# Altium PCB WINGS_SIGNAL_PCB.PcbDoc
Units mm, origin at the board's own origin, x right, y up, seen from the top; angles counter-clockwise.
Board outline 152.4 x 101.6 mm, 2 copper layers (Top Layer, Bottom Layer); 38 components, 33 nets, 145 pads, 26 vias.
Unrouted connection lines stored in the file: 13.
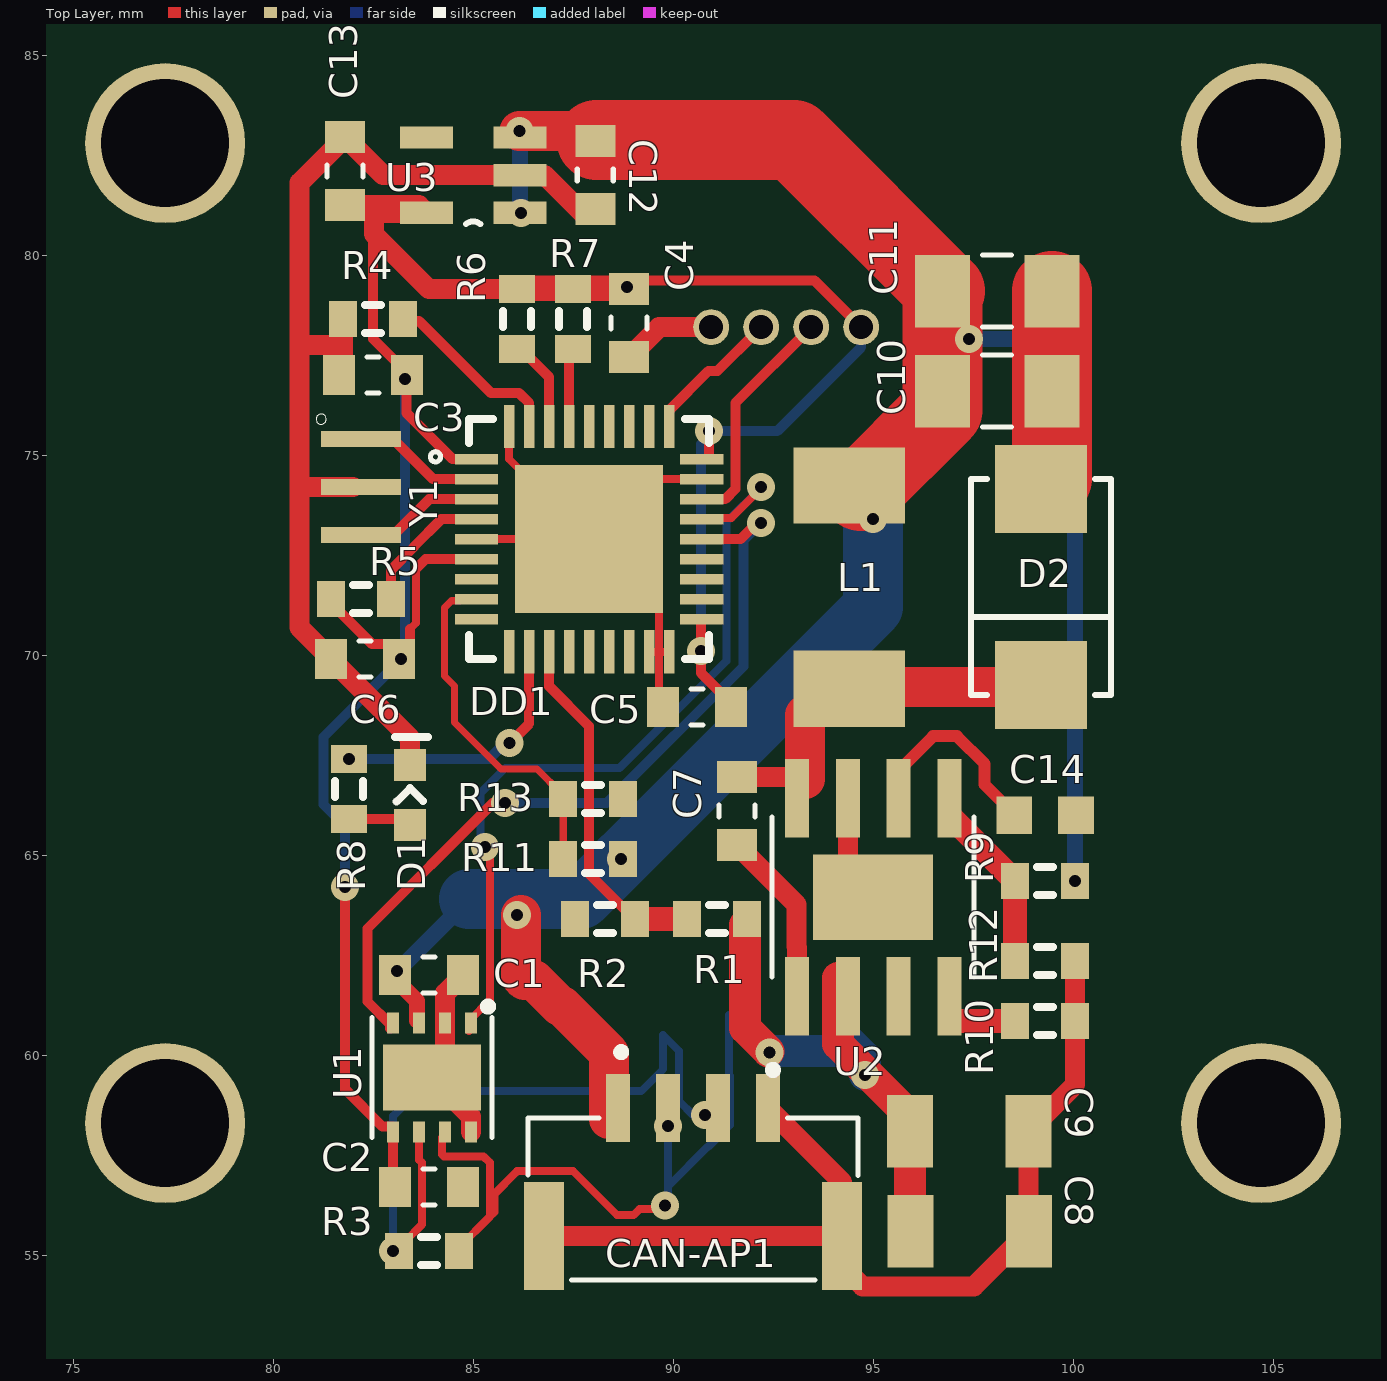
[diagram p0: Top Layer view]
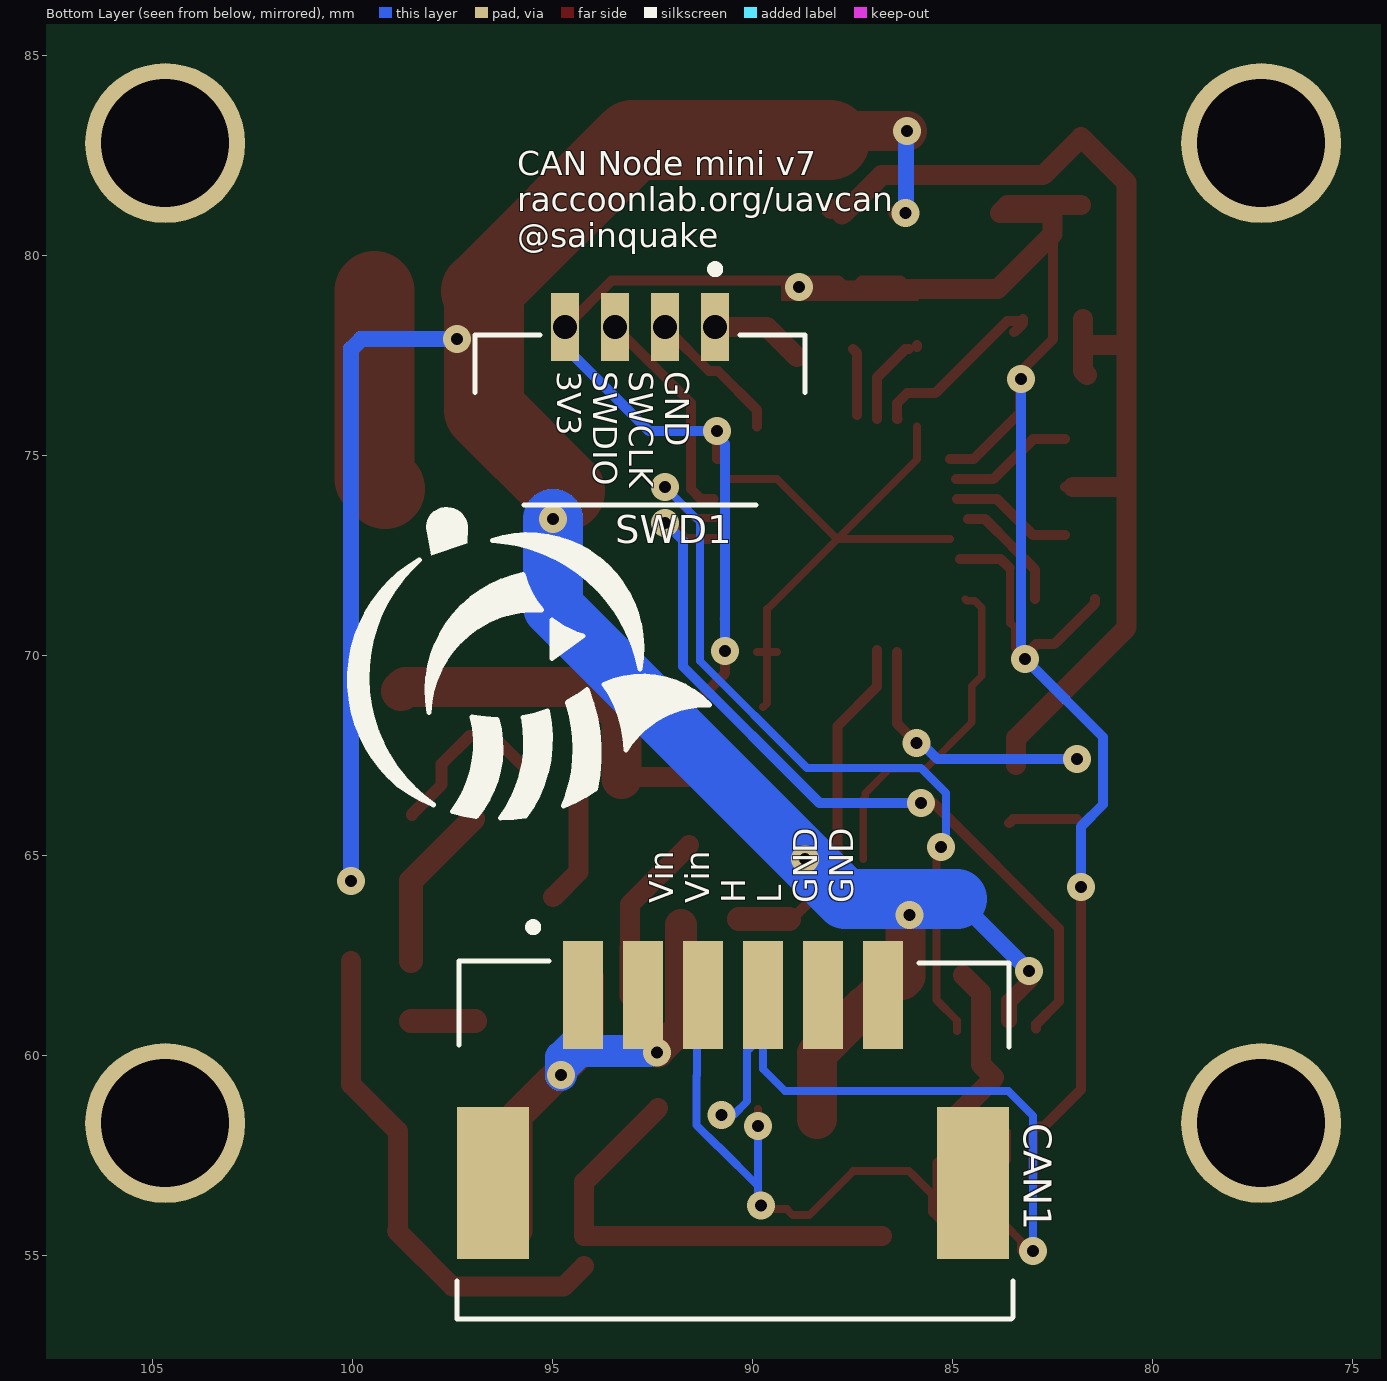
[diagram p1: Bottom Layer view, seen from below]
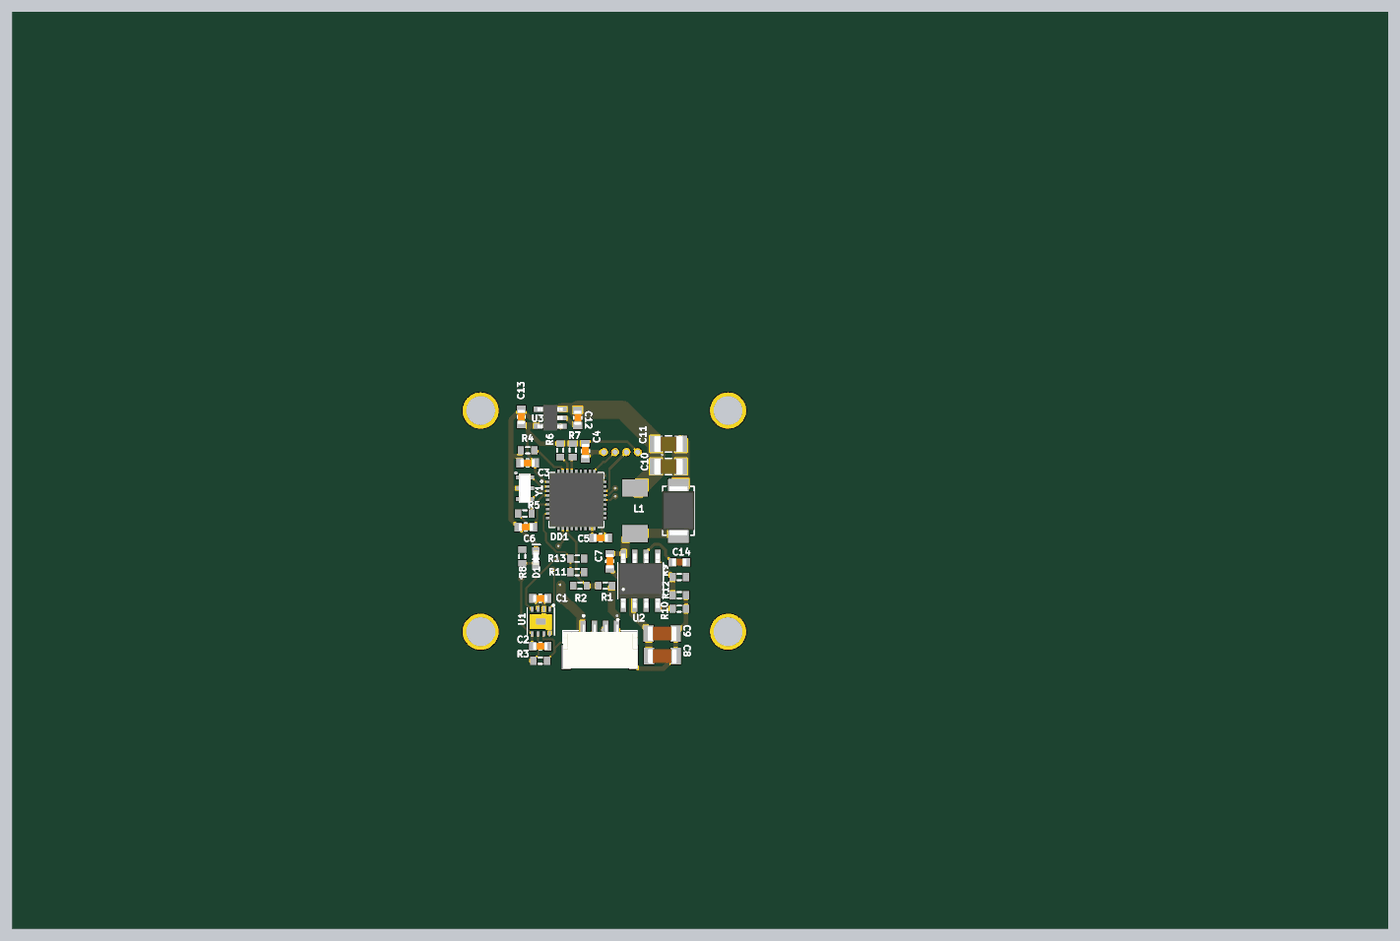
[diagram p2: 3D render of the assembled board from above, using the file's embedded part models]

## Layer stack, top to bottom
Top Solder: solder mask 0.0102, Solder Resist, Dk 3.5
Top Layer: signal copper 0.0356
Dielectric 1: dielectric 0.32, FR-4, Dk 4.8
Bottom Layer: signal copper 0.0356
Bottom Solder: solder mask 0.0102, Solder Resist, Dk 3.5

## Board outline
25.4,25.4 177.8,25.4 177.8,127 25.4,127

## Design rules (kind name [scope] priority, off if disabled: settings)
Clearance [All] p1: gap=0.17 ignorepadtopadclearanceinfootprint=FALSE
FanoutControl Fanout_SOIC [IsSOIC] p3: bgadir=Out bgaviamode=Closest fanoutstyle=Auto fanoutdirection=Alternating viagrid=0.025 // Fanout_SOIC (Default Rule)
FanoutControl Fanout_Small [(CompPinCount < 5)] p4: bgadir=Out bgaviamode=Closest fanoutstyle=Auto fanoutdirection=OutThenIn viagrid=0.025 // Fanout_Small (Default Rule)
FanoutControl Fanout_Default [All] p5: bgadir=In bgaviamode=Closest fanoutstyle=Auto fanoutdirection=Alternating viagrid=0.025 // Fanout_Default (Default Rule)
PolygonConnect [All] p1: connectstyle=Relief reliefconductorwidth=0.254 reliefentries=4 polygonreliefangle="90 Angle" airgapwidth=0.254
RoutingCorners [All] p1: cornerstyle=45-Degree minsetback=2.5 maxsetback=2.5
RoutingPriority [All] p1 off: routingpriority=0
RoutingVias [All] p1: holewidth=0.3 width=0.7 viastyle="Through Hole" minholewidth=0.3 minwidth=0.7 maxholewidth=0.8 maxwidth=1.2
SolderMaskExpansion [All] p1: expansion=0.102 istentingtop=FALSE
Width [All] p1: maxlimit=5 minlimit=0.17 preferedwidth=0.3
25 further rules are at their usual default settings.

## Components (designator, comment, footprint, x,y, rotation, side; value= is the part's Value field where it differs from the comment)
C1 "GX035C104MAT2-500" *CAPC1608X90 83.883,62.013 r0 top value=0.1u
C2 "GX035C104MAT2-500" *CAPC1608X90 83.883,56.713 r0 top value=0.1u
C3 "GX035C104MAT2-500" *CAPC1608X90 82.483,77.013 r180 top value=0.1u
C4 "GX035C104MAT2-500" *CAPC1608X90 88.883,78.313 r270 top value=0.1u
C5 "GX035C104MAT2-500" *CAPC1608X90 90.583,68.713 r180 top value=0.1u
C6 "GX035C104MAT2-500" *CAPC1608X90 82.283,69.913 r180 top value=0.1u
C7 "GX035C104MAT2-500" *CAPC1608X90 91.583,66.113 r270 top value=0.1u
C8 "GRM31CR71H225KA88L" *CAP3216X125N 97.398,55.613 r0 top value=2.2u
C9 "GRM31CR71H225KA88L" *CAP3216X125N 97.383,58.113 r0 top value=2.2u
C10 "GRM31CR61A476KE15L" *CAPC3216X125N 98.083,76.613 r180 top value=47u
C11 "GRM31CR61A476KE15L" *CAPC3216X125N 98.083,79.113 r180 top value=47u
C12 "GX035C104MAT2-500" *CAPC1608X90 88.036,82.013 r270 top value=0.1u
C13 "GX035C104MAT2-500" *CAPC1608X90 81.783,82.113 r90 top value=0.1u
C14 "GRM188R71C105KA12D" CAPC1608X90N 99.283,66.013 r180 top value=1u
CAN1 "502585-0670" MOLEX_502585-0670 90.483,61.313 r180 bottom
CAN-AP1 "SM04B-GHS-TB(LF)(SN)-" JST_SM04B-GHS-TB(LF)(SN)- 90.483,56.413 r0 top
D1 "0603-LED-BLUE" *LEDM1608X80_LTE-C1906R-14(Primary) 83.408,66.513 r270 top
D2 "SK56" *SMB_P6SMB62AT3G(Primary) 99.183,71.713 r270 top
DD1 "STM32F103T8" *QFN50P600X600X100-37N 87.883,72.913 r0 top
L1 "IHLP2020BZER100M01" IHLP 94.383,71.713 r270 top
R1 "Res3" J1-0603 91.083,63.413 r0 top value=180k
R2 "Res3" J1-0603 88.283,63.413 r0 top value=10k
R3 "Res3" J1-0603 83.883,55.113 r0 top value=120
R4 "RC0603FR-0710KL" J1-0603 82.483,78.413 r0 top value=10k
R5 "RC0603FR-0710KL" J1-0603 82.183,71.413 r0 top value=10k
R6 "Res3" J1-0603 86.083,78.413 r90 top value=4.7k
R7 "Res3" J1-0603 87.483,78.413 r90 top value=4.7k
R8 "Res3" J1-0603 81.883,66.663 r270 top value=330
R9 "Res3" J1-0603 99.283,64.363 r0 top value=56k
R10 "Res3" J1-0603 99.283,60.863 r180 top value=56k
R11 "RC0603FR-0710KL" J1-0603 87.983,64.913 r0 top value=10k
R12 "RC0603FR-0710KL" J1-0603 99.283,62.363 r180 top value=10k
R13 "RC0603FR-0710KL" J1-0603 87.983,66.413 r180 top value=10k
SWD1 "BM04B-GHS-TBT(LF)(SN)(N)" JST_BM04B-GHS-holes 92.808,74.863 r180 bottom
U1 "TJA1042" SOT782-1 83.958,59.451 r180 top
U2 "LMR16030SDDAR" "*SOIC127P600X170-9N - duplicate" 94.983,63.963 r90 top
U3 "SPX3819M5-L-3-3/TR" *SOT95P280X145-5N 84.983,82.013 r180 top value=3V3
Y1 "CSTCE8M00G55-R0" *OSC_CSTCE8M00G55-R0 82.183,74.213 r270 top

## Footprints (in the part's own frame and the unit in brackets; to place one, negate y for a bottom-side part, rotate by r counter-clockwise, add the part's x,y. Pads: shape width x height; smd on the part's side, far side on the other; paste and mask are expansions set on the pad)
*CAP3216X125N [mm]
  rect 1.15x1.82 smd: 1(-1.485,0) 2(1.485,0)
  body extent -1.6,-0.8 1.6,0.8, height 1.22
*CAPC1608X90 [mm]
  rect 0.8x1 smd: 1(-0.85,0) 2(0.85,0)
  silkscreen extent -0.15,-0.45 0.15,0.45, body extent -0.8,-0.4 0.8,0.41, height 0.88
*CAPC3216X125N [mm]
  rect 1.38x1.82 smd: 1(-1.369,0) 2(1.369,0)
  silkscreen extent -0.36,-0.9 0.36,0.9, body extent -1.6,-0.87 1.6,0.87, height 1.71
*LEDM1608X80_LTE-C1906R-14(Primary) [mm]
  rect 0.8x0.8 smd: A(0.75,0) C(-0.75,0)
  silkscreen extent -1.45,-0.38 0.16,0.45, body extent -0.8,-0.3 0.8,0.3, height 1.15
*OSC_CSTCE8M00G55-R0 [mm]
  rect 0.4x2 smd: 1(-1.2,0) 2(0,0) 3(1.2,0)
  silkscreen extent -1.83,-1.13 -1.57,-0.87, body extent -1.6,-0.65 1.6,0.65, height 1
*QFN50P600X600X100-37N [mm]
  rect 1.08x0.26 smd: 1(-2.815,2) 2(-2.815,1.5) 3(-2.815,1) 4(-2.815,0.5) 5(-2.815,0) 6(-2.815,-0.5) 7(-2.815,-1) 8(-2.815,-1.5) 9(-2.815,-2) 19(2.815,-2) 20(2.815,-1.5) 21(2.815,-1) 22(2.815,-0.5) 23(2.815,0) 24(2.815,0.5) 25(2.815,1) 26(2.815,1.5) 27(2.815,2)
  rect 0.26x1.08 smd: 10(-2,-2.815) 11(-1.5,-2.815) 12(-1,-2.815) 13(-0.5,-2.815) 14(0,-2.815) 15(0.5,-2.815) 16(1,-2.815) 17(1.5,-2.815) 18(2,-2.815) 28(2,2.815) 29(1.5,2.815) 30(1,2.815) 31(0.5,2.815) 32(0,2.815) 33(-0.5,2.815) 34(-1,2.815) 35(-1.5,2.815) 36(-2,2.815)
  rect 3.7x3.7 smd: 37(0,0)
  silkscreen extent -3.97,-3 3,3, body extent -3,-3 3,3, height 1
*SMB_P6SMB62AT3G(Primary) [mm]
  rect 2.2x2.3 smd: A(-2.45,0) C(2.45,0)
  silkscreen extent -2.7,-1.75 2.7,1.75, body extent -2.72,-1.78 2.72,1.78, height 2.49
"*SOIC127P600X170-9N - duplicate" [mm]
  rect 1.97x0.6 smd: 1(-2.475,1.905) 2(-2.475,0.635) 3(-2.475,-0.635) 4(-2.475,-1.905) 5(2.475,-1.905) 6(2.475,-0.635) 7(2.475,0.635) 8(2.475,1.905)
  rect 2.13x3 smd: 9(0,0)
  silkscreen extent -4.42,-2.52 2,2.6, body extent -3,-2.45 3,2.45, height 1.69
*SOT95P280X145-5N [mil]
  rect 52x22 smd: 1(-46,37) 2(-46,0) 3(-46,-37) 4(46,-37) 5(46,37)
  silkscreen extent -7,46 7,48, body extent -55,-57 55,57, height 57
CAPC1608X90N [mm]
  rect 0.89x0.93 smd: 1(-0.77,0) 2(0.77,0)
  body extent -0.8,-0.4 0.8,0.4, height 0.9
IHLP [mil]
  rect 75x110 smd: 1(-100,0) 2(100,0)
  body extent -100,-100 100,100, height 79
J1-0603 [mm] "Chip Resistor, Body 1.6x0.8mm, IPC High Density"
  rect 0.7x0.9 smd: 1(-0.75,0) 2(0.75,0)
  silkscreen extent -0.2,-0.35 0.2,0.35, body extent -0.85,-0.48 0.85,0.48, height 0.9
JST_BM04B-GHS-holes [mm]
  rect 0.7x1.7 / inner rect 0.6x1.7 / far side round 0.9 hole 0.6: 1(1.875,3.35) 2(0.625,3.35) 3(-0.625,3.35) 4(-1.875,3.35)
  silkscreen extent -4.13,-1.1 4.13,4.9
JST_SM04B-GHS-TB(LF)(SN)- [mm]
  rect 0.6x1.7 smd: 1(-1.875,2.275) 2(-0.625,2.275) 3(0.625,2.275) 4(1.875,2.275)
  rect 1x2.7 smd: SH1(-3.725,-0.925) SH2(3.725,-0.925)
  silkscreen extent -4.13,-2.02 4.13,3.77, body extent -4.06,-2.16 4.19,2.69, height 4.35
MOLEX_502585-0670 [mm]
  rect 1x2.7 smd: 1(-3.75,0.2) 2(-2.25,0.2) 3(-0.75,0.2) 4(0.75,0.2) 5(2.25,0.2) 6(3.75,0.2)
  rect 1.8x3.8 smd: P1(-6,-4.5) P2(6,-4.5)
  silkscreen extent -6.9,-7.9 7,2, body extent -6.65,-7.68 6.65,0.82, height 6.41
SOT782-1 [mm]
  rect 0.3x0.525 smd: 1(-0.975,-1.362) 2(-0.325,-1.362) 3(0.325,-1.362) 4(0.975,-1.362) 5(0.975,1.362) 6(0.325,1.362) 7(-0.325,1.362) 8(-0.975,1.362)
  rect 2.45x1.65 smd paste-2: P$9(0,0)
  silkscreen extent -1.5,-1.88 1.5,1.5, body extent -1.52,-1.52 1.52,1.52, height 0.85

## Part data
C1 C2 C3 C4 C5 C6 C7 C12 C13: "Cap Thin Film 0.1uf 50v 0603", Package="0603 AVX", MF=AVX, Pacage Metric=1608, SnapEDA_Link=https://www.snapeda.com/parts/GX035C104MAT2-500/AVX/view-part/?ref=snap, Type=SMD
  C1 C2 C3 C4 C5 C6 C7: MP="GX035C104MAT2-500 or CL10B104JB8NNNC"
  C12 C13: MP=GX035C104MAT2-500
C8 C9: "1206 2.2 uF 50 V В±10% Tolerance X7R SMT Multilayer Ceramic Capacitor", Package="1206 Murata", MF="Murata Electronics", MP=GRM31CR71H225KA88L, SnapEDA_Link=https://www.snapeda.com/parts/GRM31CR71H225KA88L/Murata%20Electronics%20North%20America/view-part/?ref=snap, Type=SMD
C10 C11: "Multilayer Ceramic Capacitor, GRM Series, 47 - F, - 10%, X5R, 10 V, 1206 [3216 Metric]", Package="1206 Murata Electronics", MF="Murata Electronics", MP=GRM31CR61A476KE15L, SnapEDA_Link=https://www.snapeda.com/parts/GRM31CR61A476KE15L/Murata%20Electronics%20North%20America/view-part/?ref=snap, Type=SMD
C14: "SMD Capacitor X7R(EIA) with Capacitance: 1.0uF Tol. 10%. Rated Voltage: 16Vdc", Package=0603, ChipDip_Link=https://www.chipdip.ru/product/grm188r71c105ka12d, HelpURL=https://static.chipdip.ru/lib/428/DOC005428493.pdf, MF="Murata Electronics", MP=GRM188R71C105KA12D, Pacage Metric=1608, SnapEDA_Link=https://www.snapeda.com/parts/GRM188R71C105KA12D/Murata%20Electronics%20North%20America/view-part/228340/?ref=snap, Type=SMD
CAN1: "1.50mm Pitch, CLIK-Mate PCB Receptacle, Single Row, Surface Mount, Right-Angle, Tin Plating, Positive Lock, 6 Circuits, Natural", Package=None, MF=Molex, MP=502585-0670, SnapEDA_Link=https://www.snapeda.com/parts/502494-0670/Molex/view-part/?ref=snap, System=Connector, Type=SMD
CAN-AP1: "Connector Header Surface Mount, Right Angle 4 position 0.049 _1.25mm_", Package=None, ChipDip_Link=https://www.chipdip.ru/product/sm04b-ghs-tb-lf-sn-gh-1.25mm-header-side-ent, HelpURL=http://www.farnell.com/datasheets/2082975.pdf, MF="JST Sales", MP=SM04B-GHS-TB(LF)(SN), SnapEDA_Link=https://www.snapeda.com/parts/SM04B-GHS-TB%28LF%29%28SN%29-/JST%20Sales%20America%20Inc./view-part/2759740/?ref=snap, System=Connector
D1: library part LTE-C1906R-14, "LED IrLED Chip LED 2-Pin SMD T/R", Package="0603 Lite-On", MP=0603-LED-BLUE, SnapEDA_Link=https://www.snapeda.com/parts/LTE-C1906R-14/Lite-On%20Inc./view-part/?ref=snap, Type=SMD
D2: "Диод Шоттки 5А 60В [SMB / DO-214AA]", Package="DO-214 Littelfuse", ChipDip_Link=https://www.chipdip.ru/product/sk56, MF="Littelfuse Inc.", MP=SK56, SnapEDA_Link=https://www.snapeda.com/parts/P6SMB62AT3G/Littelfuse%20Inc./view-part/?ref=snap, Type=SMD
DD1: "STM32F103T8U6, Микроконтроллер 32BIT ARM 64K FLASH [VFQFPN-36]", Package=VFQFPN-36, ChipDip_Link=https://www.chipdip.ru/product/stm32f103t8u6-2, HelpURL=http://www.st.com/stonline/products/literature/ds/13587.pdf, MF=STM, MP=STM32F103T8U6, SnapEDA_Link=https://www.snapeda.com/parts/STM32F103T8U6TR/STMicroelectronics/view-part/?ref=search&t=STM32F103T8U6, Type=SMD
L1: "10ÂµH Shielded Molded Inductor 2.3A 199mOhm Max Nonstandard", Package="Nonstandard Vishay", ChipDip_Link=https://www.chipdip.ru/product/ihlp2020bzer100m11-inductor-ihlp-smd-2020-10, HelpURL=http://www.vishay.com/docs/34253/ihlp-2020bz-01.pdf, MF="Vishay Dale", MP=IHLP2020BZER100M01, SnapEDA_Link=https://www.snapeda.com/parts/IHLP2020BZER100M01/Vishay%20Dale/view-part/44808/?ref=snap, Type=SMD
R1 R2 R6 R7 R8 R9 R10: "Resistor", Package=R0603, Pacage Metric=1608, Type=SMD
  R1: MP="180K 1% 0603"
  R2: ChipDip_Link=https://www.chipdip.ru/product0/9000079736, HelpURL=https://www.chipdip.ru/product0/9000079736, MP="10K 1% 0603"
  R6 R7: ChipDip_Link=https://www.chipdip.ru/product0/9000079736, HelpURL=https://www.chipdip.ru/product0/9000079736, MP="4.7K 1% 0603"
  R8: ChipDip_Link=https://www.chipdip.ru/product0/9000079628, HelpURL=https://www.chipdip.ru/product0/9000079628, MP=RC0603FR-07330RL
  R9 R10: ChipDip_Link=https://www.chipdip.ru/product0/9000079754, HelpURL=https://www.chipdip.ru/product0/9000079754, MP=RC0603FR-0756KL
R3: "120 Ohms 1 0.1 W 1 10 W Chip Resistor 0603 1608 Metric Thick Film", Package=R0603, ChipDip_Link=https://www.chipdip.ru/product0/9000079618, HelpURL=https://www.chipdip.ru/product0/9000079618, MP=RC0603FR-07120RL, Pacage Metric=1608, Type=SMD
R4 R5 R11 R12 R13: "10 kOhms 1 0.1 W 1 10 W Chip Resistor 0603 1608 Metric Thick Film", Package=R0603, ChipDip_Link=https://www.chipdip.ru/product0/9000079736, HelpURL=https://www.chipdip.ru/product0/9000079736, MF="Yageo or NXP", MP="10K 1% 0603", Pacage Metric=1608, SnapEDA_Link=https://www.snapeda.com/parts/RC0603FR-0710KL/Yageo/view-part/?ref=dk&t=RC0603FR-0710KL&con_ref=None, Type=SMD
SWD1: "Conn Shrouded Header HDR 4 POS 1.25mm Solder ST SMD Reel", Package=None, Instructions="Do not install", MF="JST Sales", MP=SM04B-GHS-TB(LF)(SN), SnapEDA_Link=https://www.snapeda.com/parts/BM04B-GHS-TBT%28LF%29%28SN%29%28N%29/JST%20Sales%20America%20Inc./view-part/?ref=snap, System=Connector, Type=SMD
U1: "1/1 Transceiver Half CANbus 8-SO", Package="VDFN-8 NXP USA", ChipDip_Link=https://www.chipdip.ru/product1/8002840332, HelpURL=https://static.chipdip.ru/lib/583/DOC001583059.pdf, MF="NXP USA", MP=TJA1042, SnapEDA_Link=https://www.snapeda.com/parts/TJA1042/NXP%20USA%20Inc./view-part/900919/?ref=snap, Type=SMD
U2: "LMR16030SDDAR, Conv DC-DC 4.3V to 60V Step Down Single-Out 1V to 50V 3A Automotive 8-Pin HSOP EP T/R", Package="PowerSOIC-8 Texas Instruments", ChipDip_Link=https://www.chipdip.ru/product1/8003448566, HelpURL=https://www.ti.com/lit/ds/symlink/lmr16030.pdf, MF="Texas Instruments", MP=LMR16030SDDAR, SnapEDA_Link=https://www.snapeda.com/parts/TPS54560DDA/Texas%20Instruments/view-part/?ref=snap, Type=SMD
U3: library part SPX3819M5-L, "Low Dropout Voltage Regulator, Adjustable 0.5A, В±1%, 2.5 to 16 Vin, 5-Pin SOT-23", Package="SOT-23-5 Exar", ChipDip_Link=https://www.chipdip.ru/product1/8003455237, HelpURL=http://www.farnell.com/datasheets/2614478.pdf, MF="MaxLinear, Inc.", MP=SPX3819M5-L-3-3/TR, SnapEDA_Link=https://www.snapeda.com/parts/SPX3819M5-L/MaxLinear%2C%20Inc./view-part/?ref=snap, Type=SMD
Y1: "Ceramic Resonator 8MHz ??0.5% _Tol_ ??0.2% _Stability_ 33pF 40Ohm 3-Pin CSMD T/R", Package="SMD-3 Murata", ChipDip_Link=https://www.chipdip.ru/product1/8001783721, HelpURL=https://www.murata.com/en-eu/api/pdfdownloadapi?cate=&partno=CSTCE8M00G55-R0, MF=Murata, MP=CSTCE8M00G55-R0, SnapEDA_Link=https://www.snapeda.com/parts/CSTCE8M00G55-R0/Murata%20Electronics%20North%20America/view-part/?ref=snap, Type=SMD

## Free pads (board coordinates)
  round 4 hole 3.2: ""(77.283,58.313) ""(77.283,82.813) ""(104.683,58.313) ""(104.683,82.813)

## Via types
v1: diameter 0.7, hole 0.3, Top Layer to Bottom Layer, tented both sides, 26 vias

## Nets (pads, with @x,y where several pads share a name; then routed paths per layer and width w, separated by ;. In a path a pad name is that pad's centre, name@x,y a point inside that pad or via, vN(x,y) a via of type N, cw(c..) or ccw(c..) an arc to the next point about the centre after c; other vN are vias at no path point)
3.3: C2.1 C3.1 C4.1 C5.1 C6.1 C13.1 DD1.1 DD1.6 DD1.19 DD1.27 R5.1 R6.2 R7.2 SWD1.4 U1.5 U3.5 | length 66.5
  Top Layer w0.2: 83.408,70.671 83.558,70.821 83.558,72.177 83.578,72.197
  Top Layer w0.25: R5.1 81.433,71.313 82.458,70.288 82.908,70.288 C6.1@83.183,70.013 ; v1(81.783,64.213) 81.783,59.159 82.716,58.226 82.958,58.226 82.983,58.201 U1.5 82.983,56.813 C2.1@82.883,56.713 ; 82.502,80.539 82.483,80.52 82.483,77.918 83.058,77.343 83.283,77.118 v1(83.283,76.913) ; C3.1@83.183,76.813 C3.1@83.183,76.913 ; C3.1 83.312,76.993 83.312,76.073 84.472,74.913 DD1.1 ; C6.1@83.408,70.188 83.408,70.671 ; 83.578,72.197 83.794,72.413 DD1.6@84.808,72.413 ; R6.2 86.294,79.375 87.271,79.375 R7.2 87.533,79.163 87.583,79.113 87.844,79.375 88.671,79.375 v1(88.833,79.213) ; C4.1 v1(88.833,79.213) ; DD1.19 90.683,70.898 v1(90.683,70.113) 90.683,69.563 91.483,68.763 C5.1@91.483,68.713 ; DD1.27@90.783,74.913 90.878,74.913 90.883,74.918 v1(90.883,75.613) ; SWD1.4 93.521,79.375 88.994,79.375 v1(88.833,79.213)
  Top Layer w0.5: C13.1 83.625,81.263 U3.5 82.502,81.074 82.502,80.539 83.877,79.163 R6.2
  Bottom Layer w0.25: v1(81.783,64.213) 81.783,65.735 81.238,66.28 81.238,67.968 v1@83.083,69.813 ; v1(83.183,69.913) 83.283,70.013 v1(83.283,76.913) ; v1(90.683,70.113) 90.683,75.292 90.883,75.492 v1@90.883,75.513 ; v1(90.883,75.613) 92.583,75.613 94.683,77.713 SWD1.4
5V: C1.1 C10.2 C11.2 C12.1 CAN-AP1.1 L1.1 R9.2 R11.2 U1.3 U3.1 U3.3 | length 62.1
  Top Layer w0.4: v1(83.083,62.113) 83.083,62.063 C1.1 83.033,61.913 83.583,61.363 U1.3@83.583,60.876 ; v1(86.177,81.074) U3.1@86.405,81.074 ; v1(94.983,73.413) L1.1@95.083,73.513
  Top Layer w1: v1(86.137,83.113) 87.786,83.113 C12.1 ; v1@86.173,63.513 86.173,61.981 86.263,61.891 86.505,61.891 87.153,61.243 87.198,61.243 88.383,60.058 CAN-AP1.1@88.383,58.413
  Top Layer w2: C12.1@88.067,82.894 93.002,82.894 C11.2@96.783,79.113 ; L1.1@94.683,74.113 96.714,76.144 C10.2 C11.2
  Bottom Layer w0.4: v1(83.083,62.113) 84.883,63.913 ; v1(86.137,83.113) 86.157,83.093 86.157,81.093 v1(86.177,81.074) ; v1(97.383,77.913) 99.783,77.913 100.033,77.663 v1(100.033,64.363)
  Bottom Layer w1.5: 84.883,63.913 87.683,63.913 v1(88.683,64.913) 94.983,71.213 v1(94.983,73.413)
  other v1: 86.073,63.513
ADC_5V: DD1.8 R11.1 R13.2 | length 8.5
  Top Layer w0.18: DD1.8@84.683,71.413 84.643,71.373 84.443,71.373 84.268,71.198 84.268,69.491 84.518,69.241 84.518,68.328 85.677,67.168 86.578,67.168 87.183,66.563 R13.2@87.183,66.413 ; R11.1 R13.2
ADC_VIN: DD1.12 R1.1 R2.2 | length 8.9
  Top Layer w0.25: DD1.12@86.883,70.138 86.883,69.234 87.878,68.239 87.878,64.551 R2.2@89.016,63.413
  Top Layer w0.6: R2.2@89.083,63.413 R1.1
BOOT0: DD1.35 R4.2 | length 4.8
  Top Layer w0.25: R4.2 R4.2@83.233,78.363 ; R4.2@83.458,78.088 83.233,78.313 R4.2@83.233,78.363 ; DD1.35@86.383,75.913 86.378,75.918 86.383,75.918 86.383,76.316 86.135,76.563 85.433,76.563 83.633,78.363 R4.2@83.233,78.363
CAN_H: CAN1.3 CAN-AP1.2 R3.2 U1.7 | length 17.1
  Top Layer w0.2: U1.7@84.208,57.951 84.208,57.526 84.25,57.483 85.245,57.483 85.403,57.325 85.403,55.983 84.633,55.213 R3.2 ; 85.462,56.043 85.514,56.095 85.514,56.545 86.049,57.08 ; 86.083,57.113 87.483,57.113 88.583,56.013 88.993,56.013 89.142,56.163 89.687,56.163 v1(89.783,56.258) ; v1(89.858,58.238) CAN-AP1.2@89.858,58.663
  Bottom Layer w0.2: v1(89.783,56.258) 89.858,56.333 89.858,56.738 ; v1(89.858,58.238) 89.858,56.738 ; CAN1.3@91.383,61.013 91.383,59.513 91.398,59.498 91.398,58.262 90.865,57.728 90.848,57.728 89.858,56.738
CAN_L: CAN1.4 CAN-AP1.3 R3.1 U1.6 | length 17.2
  Top Layer w0.2: R3.1@83.283,55.113 83.283,55.363 83.703,55.783 83.703,57.325 83.633,57.395 U1.6
  Bottom Layer w0.2: v1(82.983,55.113) 82.983,58.495 83.601,59.113 89.183,59.113 89.733,59.663 89.733,60.513 90.133,60.113 90.133,58.863 90.478,58.518 v1(90.778,58.518)
CAN_RXD: DD1.23 U1.4 | length 20.1
  Top Layer w0.25: U1.4@82.908,60.676 82.908,60.788 82.338,61.358 82.338,63.181 85.471,66.313 v1(85.783,66.313) ; DD1.23@90.836,72.913 91.664,72.913 92.063,73.313 v1(92.183,73.313)
  Bottom Layer w0.25: v1(85.783,66.313) 88.318,66.313 91.738,69.733 91.738,72.881 92.171,73.313 v1(92.183,73.313)
CAN_TXD: DD1.24 U1.1 | length 20.3
  Top Layer w0.2: U1.1@84.883,60.613 84.883,60.876 85.403,61.396 85.403,65.093 v1(85.283,65.213) ; DD1.24 90.728,73.443 91.436,73.443 92.183,74.19 v1(92.183,74.213)
  Bottom Layer w0.2: v1(85.283,65.213) 85.163,65.333 85.163,66.57 85.786,67.193 88.64,67.193 91.318,69.872 91.318,73.349 v1(92.183,74.213)
FB: R9.1 R12.2 U2.5 | length 4.2
  Top Layer w0.6: U2.5@96.983,65.913 98.383,64.513 R9.1 R12.2
GND: C1.2 C2.2 C3.2 C4.2 C5.2 C6.2 C8.2 C9.2 C10.1 C11.1 C12.2 C13.2 C14.1 CAN1.5 CAN1.6 CAN1.P1 CAN1.P2 CAN-AP1.4 CAN-AP1.SH1 CAN-AP1.SH2 D1.C D2.A DD1.5 DD1.17 DD1.18 DD1.26 DD1.36 DD1.37 R2.1 R4.1 R10.1 R12.1 SWD1.1 U1.2 U1.8 U1.P$9 U2.7 U2.9 U3.2 Y1.2 | length 83
  Top Layer w0.2: DD1.5 DD1.37 ; DD1.36 85.883,74.913 DD1.37 ; DD1.17 89.633,70.098 ; C5.2 89.633,68.813 89.633,70.098 ; DD1.18 89.633,70.098 ; DD1.26 89.383,74.413 DD1.37 ; DD1.37 89.633,71.163 89.633,70.098
  Top Layer w0.25: Y1.2@81.983,74.213 Y1.2
  Top Layer w0.5: 80.646,74.213 Y1.2@81.983,74.213 ; C3.2 81.733,77.113 81.733,77.763 ; R4.1 81.733,77.763 ; D1.C 83.408,67.938 C6.2 80.645,70.701 80.645,74.213 80.645,77.724 ; C1.2 84.283,61.563 U1.2 84.283,59.776 U1.P$9 84.933,58.476 U1.8 ; CAN-AP1.SH1 CAN-AP1.SH2 94.208,56.838 CAN-AP1.4 ; C12.2 87.874,81.163 87.757,81.28 87.757,81.026 86.77,82.013 U3.2 82.733,82.013 C13.2 80.645,81.826 80.645,77.724 ; C4.2 89.633,78.213 SWD1.1 ; CAN-AP1.SH2@94.213,54.738 94.722,54.229 97.498,54.229 C8.2 98.868,55.628 C9.2 100.033,59.278 R10.1 R12.1 ; U2.7 94.348,64.598 U2.9 ; 80.645,77.724 80.684,77.763 81.733,77.763
  Top Layer w2: D2.A 99.452,74.432 C10.1 C11.1
LED1: DD1.11 R8.1 | length 6.7
  Top Layer w0.25: v1(85.895,67.813) 86.383,68.301 86.383,69.14 DD1.11
  Bottom Layer w0.25: v1(81.883,67.413) 85.373,67.413 85.773,67.813 v1(85.895,67.813)
NetC7_1: C7.1 D2.C L1.2 U2.8 | length 9
  Top Layer w0.5: C7.1 93.033,66.963 U2.8@93.083,66.913
  Top Layer w1: U2.8@93.278,66.923 93.278,68.513 93.938,69.173 L1.2 94.428,69.218 98.678,69.218 D2.C@98.783,69.113
NetC7_2: C7.2 U2.1 | length 4.4
  Top Layer w0.5: C7.2 93.063,63.783 93.063,62.725 93.078,62.71 U2.1
NetC14_2: C14.2 U2.6 | length 4.9
  Top Layer w0.3: U2.6@95.483,66.713 95.483,66.988 96.484,67.989 97.075,67.989 97.769,67.295 97.769,66.777 98.513,66.033 C14.2
NetD1_A: D1.A R8.2 | length 1.7
  Top Layer w0.25: R8.2 83.483,65.913 D1.A@83.583,65.813
NetDD1_2: DD1.2 Y1.1 | length 3.1
  Top Layer w0.25: Y1.1 82.983,75.413 83.983,74.413 DD1.2@84.908,74.413
NetDD1_3: DD1.3 Y1.3 | length 3.1
  Top Layer w0.25: Y1.3 82.983,73.013 83.883,73.913 DD1.3@84.883,73.913
NetR10_2: R10.2 U2.4 | length 1.7
  Top Layer w0.2: U2.4@96.883,60.913 U2.4@96.933,60.863
  Top Layer w0.6: U2.4@96.933,60.863 R10.2
NRST: DD1.4 R5.2 | length 2.9
  Top Layer w0.25: R5.2 82.933,72.146 83.501,72.715 83.501,72.732 84.183,73.413 DD1.4@84.608,73.413
PA15: DD1.29
PB3: DD1.30
PB4: DD1.31
PB5: DD1.32
SCL/A2: DD1.33 R7.1 | length 1.7
  Top Layer w0.25: DD1.33@87.383,76.013 87.383,77.563 R7.1
SDA/A1: DD1.34 R6.1 | length 2.2
  Top Layer w0.25: R6.1@85.883,77.713 R6.1@85.883,77.763 ; R6.1 86.183,77.663 86.883,76.963 DD1.34@86.883,75.913
SWDIO: DD1.25 SWD1.3 | length 5.5
  Top Layer w0.25: DD1.25@90.971,73.913 91.285,73.913 91.538,74.166 91.538,76.318 SWD1.3
SWLK: DD1.28 SWD1.2 | length 3.5
  Top Layer w0.25: DD1.28 89.883,76.138 90.861,77.116 91.086,77.116 92.083,78.113 SWD1.2@92.183,78.113
T3CH1/ADC6: DD1.13
T3CH2/ADC7: DD1.14
T3CH3/ADC8: DD1.15
T3CH4/ADC9: DD1.16
Vin: C8.1 C9.1 CAN1.1 CAN1.2 R1.2 U2.2 | length 14.3
  Top Layer w0.4: v1@92.263,60.083 v1(92.392,60.083)
  Top Layer w0.8: R1.2@91.783,63.263 91.783,60.692 v1@92.367,60.108 ; U2.2@94.108,61.938 94.108,60.288 95.898,58.498 C9.1 95.905,58.106 C8.1@95.905,55.636
  Bottom Layer w0.8: v1@92.583,60.113 94.133,60.113 94.233,60.213 v1@94.783,59.663 ; CAN1.1@94.233,60.513 94.783,59.963 v1@94.783,59.663 ; v1(94.783,59.513) v1@94.783,59.663
pads on no net: DD1.7 DD1.9 DD1.10 DD1.20 DD1.21 DD1.22 R13.1 U2.3 U3.4

## Other copper
Top Layer:
  rectangle net 3.3: 85.852,78.867 89.281,79.375

## Silkscreen, mask and mechanical layers (free items; w line width, h text height)
Bottom Overlay:
  region: 96.301,65.94 cw(c96.315,70.24) 95.674,65.988 cw(c98.344,67.916) 95.125,68.614 ccw(c96.334,72.021) 95.73,68.456 ccw(c98.82,67.834)
  region: 98.026,72.513 98.145,73.157 ccw(c98.147,73.162) 98.152,73.161 ccw(c97.641,73.204) 97.128,73.204 ccw(c97.133,73.204) 97.128,73.203 ccw(c97.641,73.204) 97.128,73.193 97.128,73.203 cw(c97.641,73.204) 97.128,73.204 97.128,73.193 97.132,72.81 cw(c97.137,72.81) 97.132,72.81 ccw(c97.137,72.81) 97.135,72.805 98.019,72.509 ccw(c98.02,72.514)
  region: 94.242,70.493 ccw(c93.658,72.557) 95.008,70.891 95.008,69.935
  region: 97.497,66.105 cw(c96.315,70.24) 96.907,65.981 cw(c98.942,67.684) 96.388,68.406 ccw(c96.334,72.021) 97.006,68.469 ccw(c99.71,67.797)
  region: 94.726,66.244 cw(c96.315,70.24) 93.921,66.668 cw(c98.237,67.546) 94.135,69.151 ccw(c96.334,72.021) 94.627,68.834 ccw(c98.014,67.666)
  region: 98.089,68.585 ccw(c95.166,69.112) 95.736,72.027 cw(c93.658,72.557) 95.273,71.146 cw(c95.427,68.485)
  region: 97.977,66.274 ccw(c96.315,70.24) 98.84,66.759 ccw(c96.633,69.399) 98.32,72.397 cw(c95.734,69.471)
  region: 93.164,67.646 cw(c96.107,67.583) 93.705,69.284 ccw(c92.748,67.175) 91.07,68.771 cw(c91.147,66.403)
  region: 92.815,69.671 cw(c95.6,70.191) 96.5,72.878 ccw(c96.718,68.907)
  lines w0.01: 97.133,73.204 97.137,72.81 98.02,72.514 98.148,73.204 ; 97.136,73.153 cw(c97.641,73.204) 98.147,73.162
  lines w0.127: 91.07,68.771 cw(c91.147,66.403) 93.164,67.646 cw(c96.107,67.583) 93.705,69.284 ccw(c92.748,67.175) 91.07,68.771 ; 92.815,69.671 cw(c95.6,70.191) 96.5,72.878 ccw(c96.718,68.907) 92.815,69.671 ; 93.921,66.668 cw(c98.237,67.546) 94.135,69.151 ccw(c96.334,72.021) 94.627,68.834 ccw(c98.014,67.666) 94.726,66.244 cw(c96.315,70.24) 93.921,66.668 ; 94.242,70.493 ccw(c93.658,72.557) 95.008,70.891 95.008,69.935 94.242,70.493 ; 95.125,68.614 ccw(c96.334,72.021) 95.73,68.456 ccw(c98.82,67.834) 96.301,65.94 cw(c96.315,70.24) 95.674,65.988 cw(c98.344,67.916) 95.125,68.614 ; 95.273,71.146 ccw(c93.658,72.557) 95.736,72.027 cw(c95.166,69.112) 98.089,68.585 ccw(c95.427,68.485) 95.273,71.146 ; 96.388,68.406 ccw(c96.334,72.021) 97.006,68.469 ccw(c99.71,67.797) 97.497,66.105 cw(c96.315,70.24) 96.907,65.981 cw(c98.942,67.684) 96.388,68.406 ; 97.977,66.274 ccw(c96.315,70.24) 98.84,66.759 ccw(c96.633,69.399) 98.32,72.397 cw(c95.734,69.471) 97.977,66.274
  text "CAN Node mini v7 / raccoonlab.org/uavcan / @sainquake" at 95.883,80.213 h0.6
  text "GND / SWCLK / SWDIO / 3V3" at 94.883,77.113 h0.6 r90
  text "Vin / Vin / H / L / GND / GND" at 87.483,63.813 h0.6 r270